# Altium PCB V1.PcbDoc
Units mm, origin at the board's own origin, x right, y up, seen from the top; angles counter-clockwise.
Board outline 39.1 x 25.27 mm, 4 copper layers (Component Side, Ground Plane, Power Plane, Solder Side), stack 0.844 mm thick; 49 components, 35 nets, 155 pads, 29 vias.
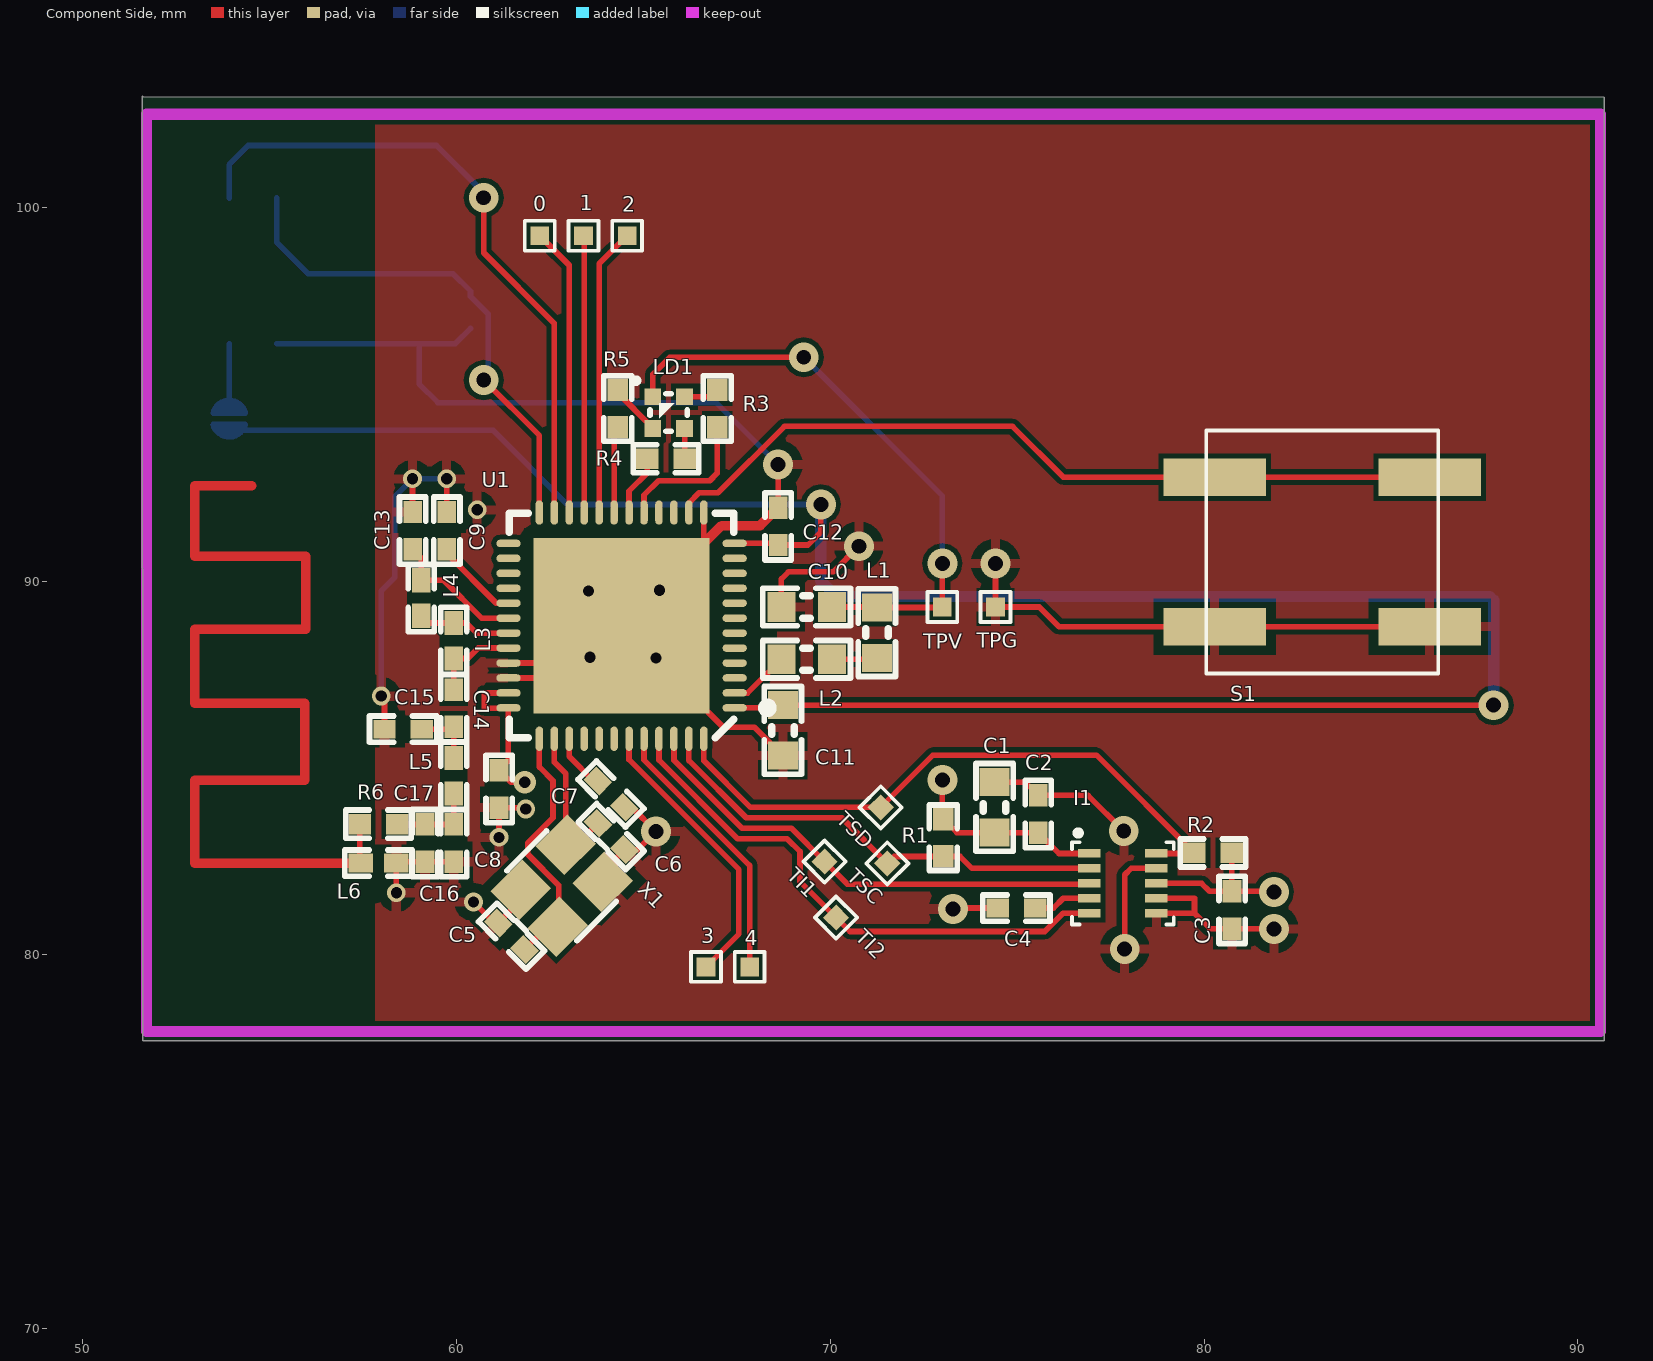
[diagram p0: Component Side view]
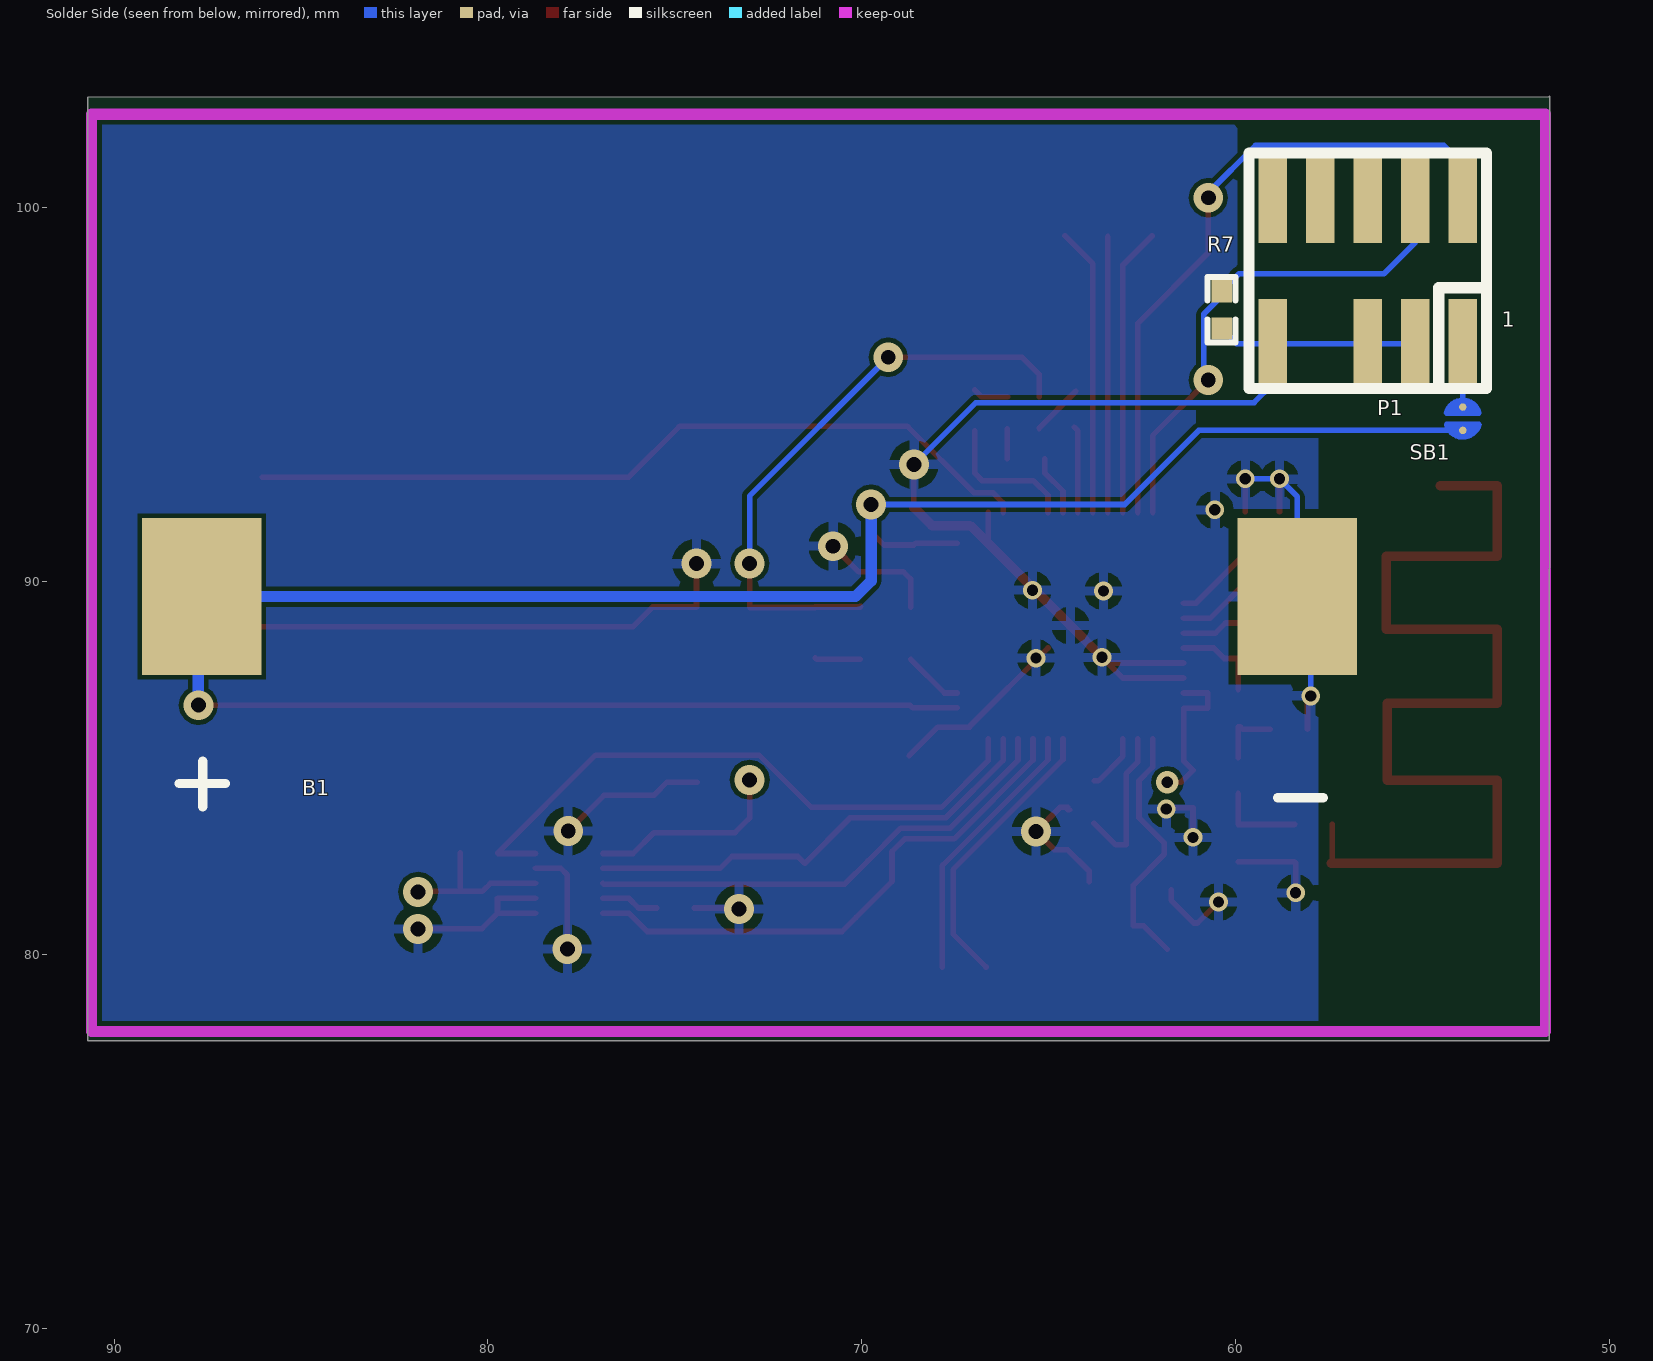
[diagram p1: Solder Side view, seen from below]
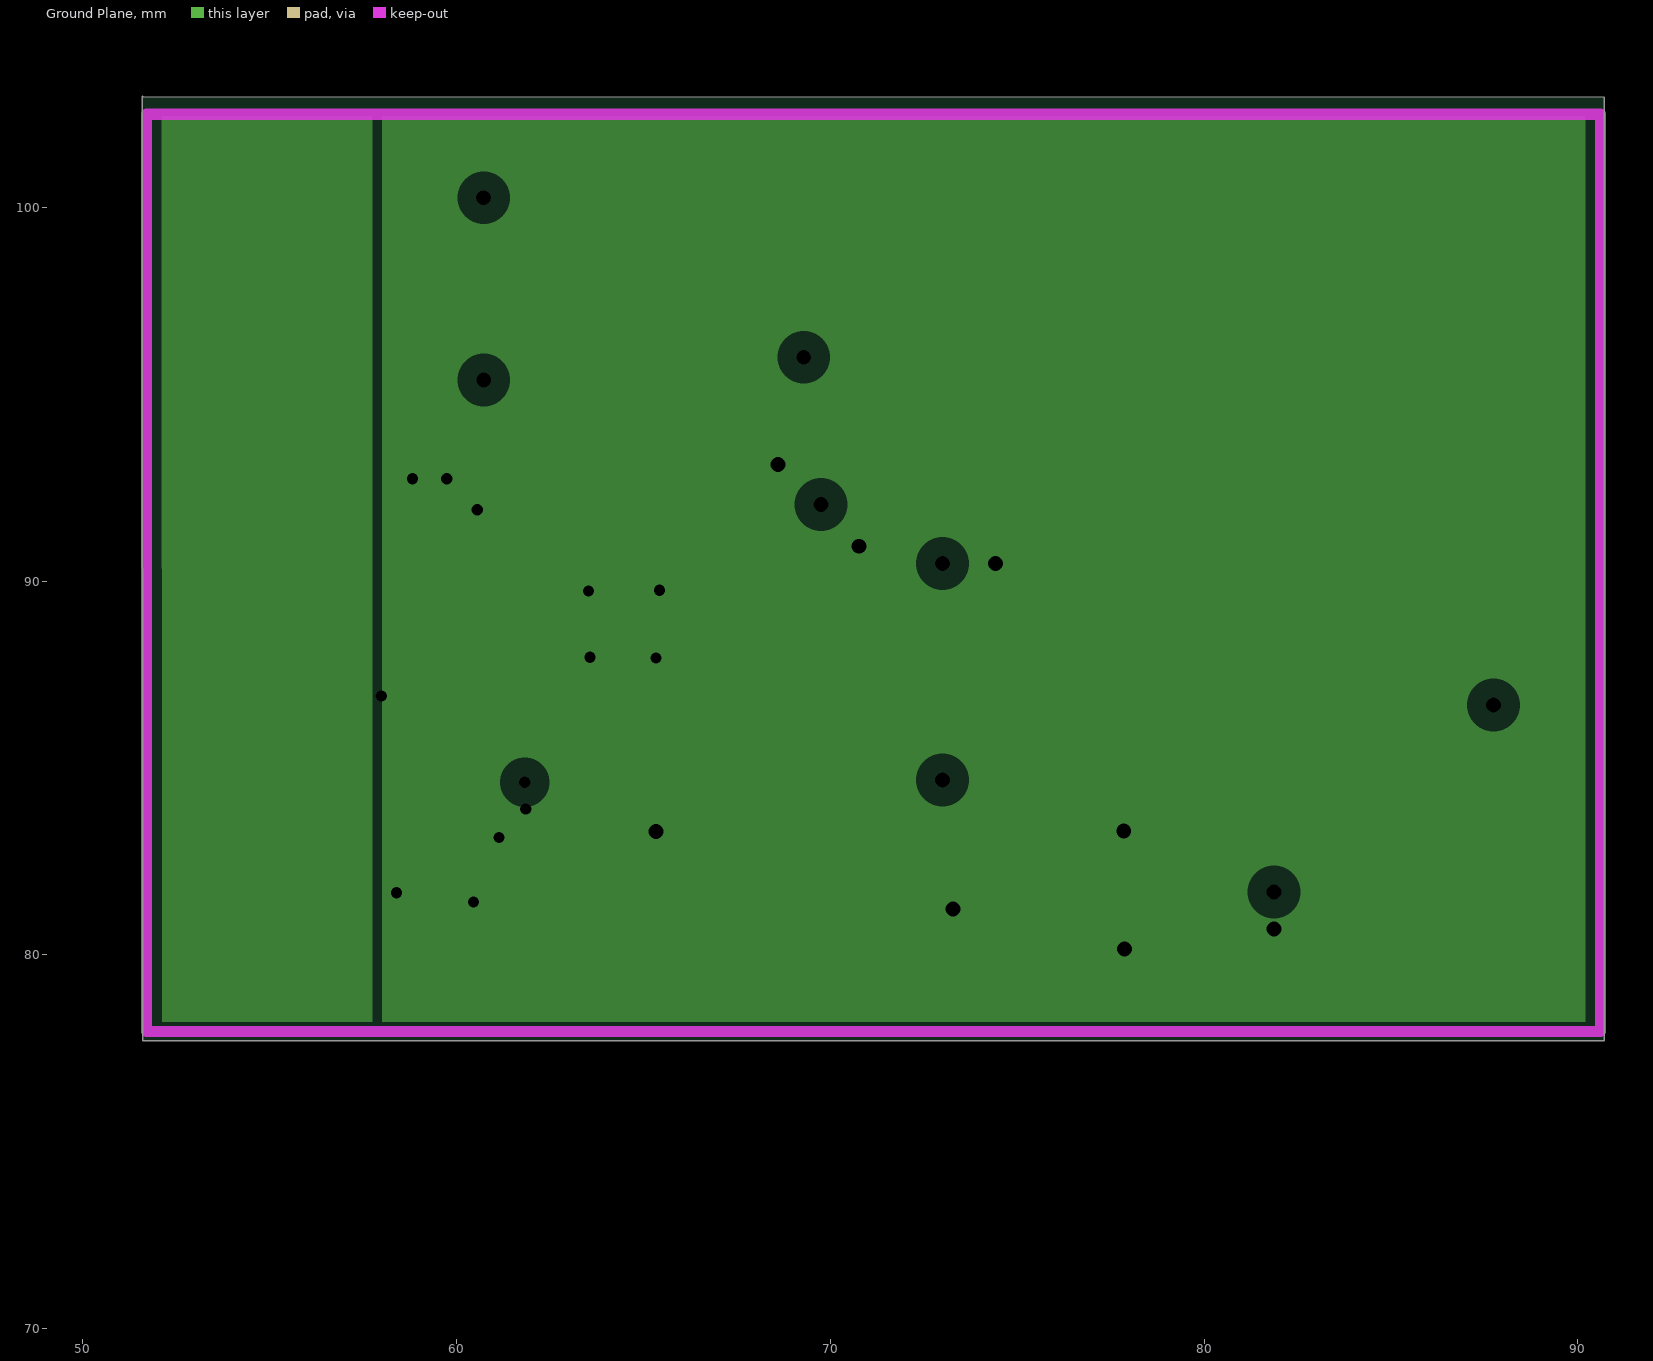
[diagram p2: Ground Plane, clearances drawn from the general rule]
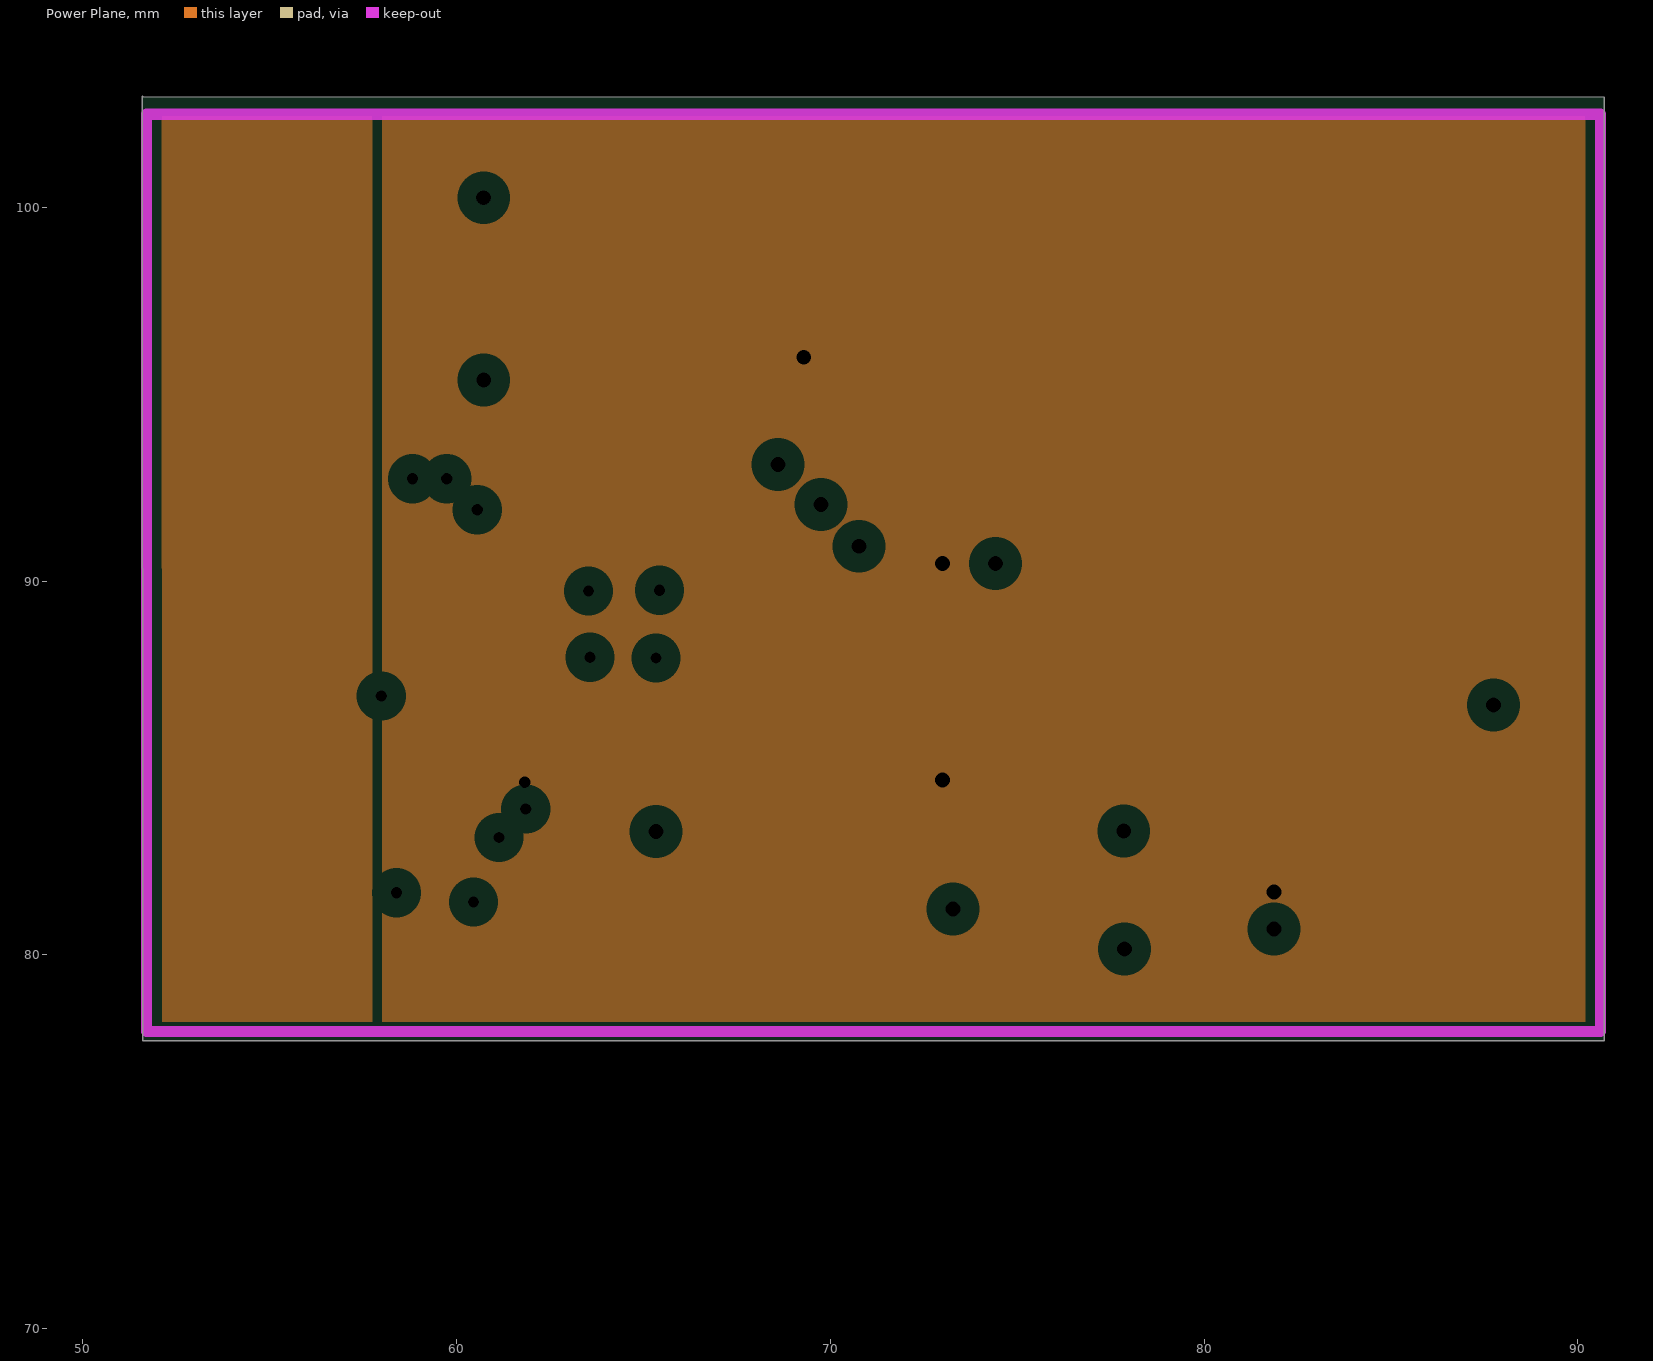
[diagram p3: Power Plane, clearances drawn from the general rule]
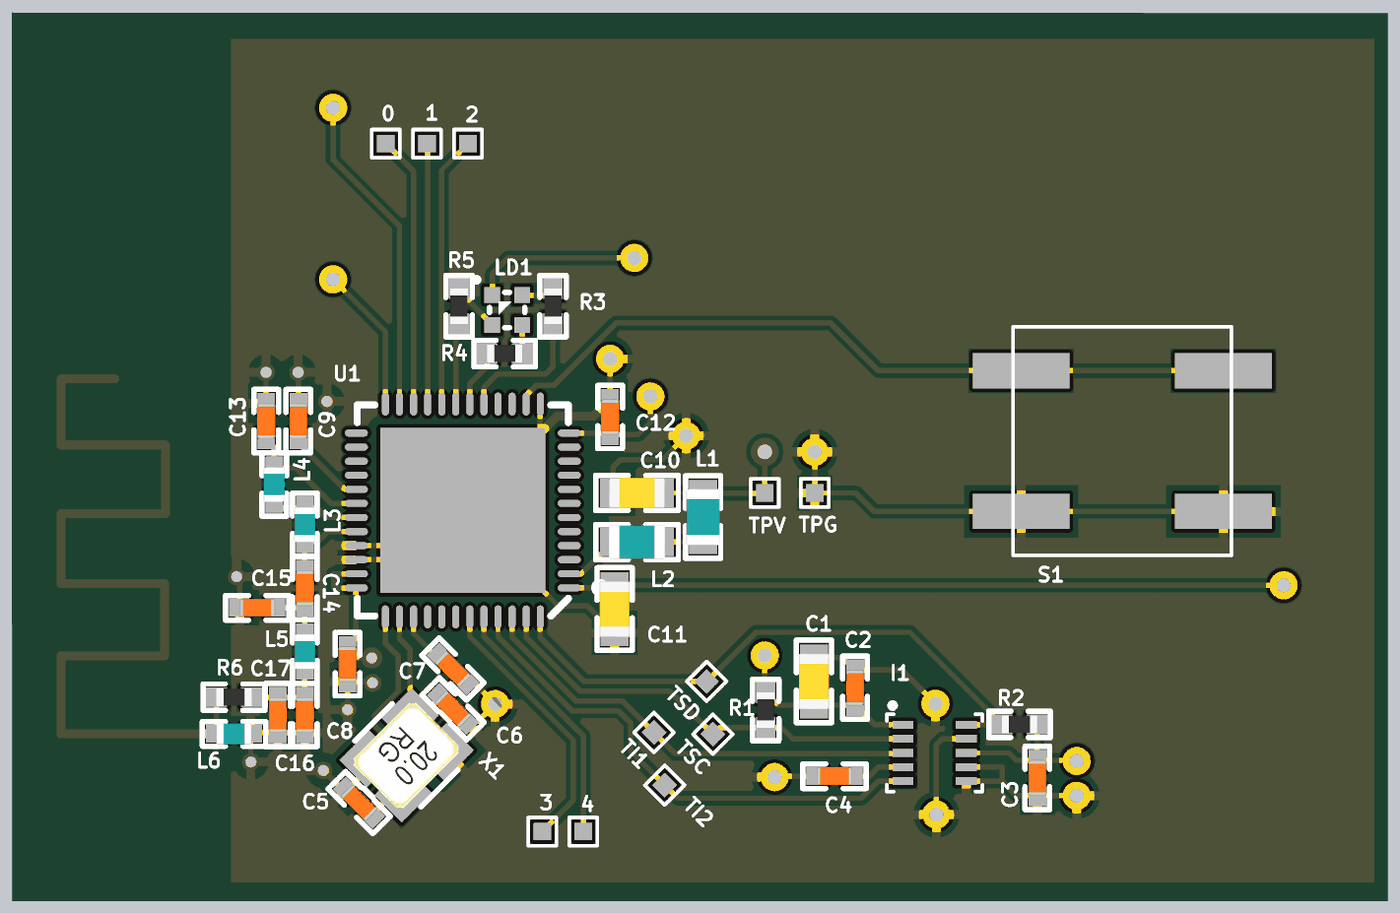
[diagram p4: 3D render of the assembled board from above, using the file's embedded part models]

## Layer stack, top to bottom
Top Solder: solder mask 0.0102, Solder Resist, Dk 3.5
Component Side: signal copper 0.0356
Dielectric 1: core 0.32, FR-4, Dk 4.8
Ground Plane: plane copper 0.036, net GND
Dielectric 3: prepreg 0.127, Dk 4.2
Power Plane: plane copper 0.036, net AVDD
Dielectric 4: core 0.254, Dk 4.2
Solder Side: signal copper 0.0356
Bottom Solder: solder mask 0.0102, Solder Resist, Dk 3.5

## Board outline
51.6,102.972 51.613,102.959 90.703,102.946 90.703,77.699 51.613,77.699

## Design rules (kind name [scope] priority, off if disabled: settings)
Clearance [All] p1: gap=0.127
HoleSize [All] p1: absolutevalues=TRUE maxlimit=2.54 minlimit=0.1 maxpercent=80.000 minpercent=20.000
MinimumAnnularRing [All] p1: minimumring=0.1
PlaneClearance [All] p1: clearance=0.508
PlaneConnect [All] p1: planeconnectstyle=Relief reliefexpansion=0.508 reliefentries=4 reliefconductorwidth=0.254 reliefairgap=0.254
PolygonConnect [All] p1: connectstyle=Relief reliefconductorwidth=0.254 reliefentries=4 polygonreliefangle="90 Angle" airgapwidth=0.254
RoomDefinition V1.3 [InComponentClass('V1.3')] p1: confinementstyle=ConfineIn formatcopy=TRUE lockcomponents=FALSE outline 52.316,78.156 90.729,78.156 90.729,101.854 52.316,101.854
RoutingVias [All] p1: holewidth=0.203 width=0.406 viastyle="Through Hole" minholewidth=0.1 minwidth=0.254 maxholewidth=0.711 maxwidth=1.27
SMDNeckDown [All] p1 off: percent=50.000
SolderMaskExpansion [All] p1: expansion=0.102
Width [All] p1: maxlimit=2.54 minlimit=0.025 preferedwidth=0.152
26 further rules are at their usual default settings.

## Classes and differential pairs
component class V1.3: 0 1 2 3 4 C1 C2 C3 C4 C5 C6 C7 C8 C9 C10 C11 C12 C13 C14 C15 C16 C17 I1 L1 L2 L3 L4 L5 L6 LD1 P1 R1 R2 R3 R4 R5 R6 R7 S1 TI1 TI2

## Components (designator, comment, footprint, x,y, rotation, side; value= is the part's Value field where it differs from the comment)
0 "Value" TP_SMD_0.5mmX0.5mm 62.23,99.238 r90 top
1 "Value" TP_SMD_0.5mmX0.5mm 63.398,99.238 r90 top
2 "Value" TP_SMD_0.5mmX0.5mm 64.567,99.238 r90 top
3 "Value" TP_SMD_0.5mmX0.5mm 66.675,79.68 r90 top
4 "Value" TP_SMD_0.5mmX0.5mm 67.843,79.68 r90 top
B1 "BAT" BU2032SM-BT-GTR 73,89.586 r180 top
C1 "1.0µF" CAPC1608X06L 74.397,83.947 r270 top
C2 "0.1µF" CAPC1005X04L 75.565,83.769 r270 top
C3 "0.1µF" CAPC1005X04L 80.747,81.204 r90 top
C4 "0.1µF" CAPC1005X04L 74.981,81.255 r0 top
C5 "12pF" CAPC1005X04L 61.473,80.502 r315 top
C6 "12pF" CAPC1005X04L 64.14,83.169 r135 top
C7 "0.1µF" CAPC1005X04L 64.135,84.303 r135 top
C8 "1000pF" CAPC1005X04L 61.142,84.439 r90 top
C9 "0.047µF" CAPC1005X04L 59.745,91.348 r270 top
C10 "1.0µF" CAPC1608X06L 69.367,89.306 r0 top
C11 "4.7µF" CAPC1608X06L 68.732,86.004 r90 top
C12 "0.1µF" CAPC1005X04L 68.605,91.465 r270 top
C13 "2200pF" CAPC1005X04L 58.831,91.348 r270 top
C14 "2.2pF" CAPC1005X04L 59.93,86.598 r270 top
C15 "0.80pF" CAPC1005X04L 58.577,86.039 r0 top
C16 "1.5pF" CAPC1005X04L 59.93,82.991 r90 top
C17 "1.0pF" CAPC1005X04L 59.161,82.991 r90 top
I1 "#NAME?" DFN10P200X200X100 77.826,81.915 r0 top
L1 "15nH" INDC1608X06L 71.247,88.621 r270 top
L2 "Value" INDC1608X06L 69.367,87.909 r180 top
L3 "4.7nH" INDC1005X04L 59.93,88.402 r270 top
L4 "Value" INDC1005X04L 59.061,89.545 r270 top
L5 "3.3nH" INDC1005X04L 59.93,84.795 r270 top
L6 "Value" INDC1005X04L 57.917,82.458 r180 top
LD1 "Value" SML-LX0404SIUPGUSB 65.678,94.507 r90 top
P1 "#NAME?" HDR_2x5-SMD-1.27mm-SWD 56.464,98.298 r0 top
R1 "Resistance" RESC1005X04L 73.025,83.134 r90 top
R2 "Resistance" RESC1005X04L 80.239,82.728 r0 top
R3 "Resistance" RESC1005X04L 66.98,94.615 r270 top
R4 "Resistance" RESC1005X04L 65.608,93.269 r180 top
R5 "Resistance" RESC1005X04L 64.313,94.615 r270 top
R6 "Resistance" RESC1005X04L 57.917,83.499 r180 top
R7 "Resistance" RESC1005X04L 60.376,97.257 r90 bottom
S1 "#NAME?" B3SL-1002P 83.16,90.78 r0 top
SB1 "Value" Solderbridge 53.924,94.031 r90 bottom
TI1 "Value" TP_SMD_0.5mmX0.5mm 69.85,82.499 r45 top
TI2 "Value" TP_SMD_0.5mmX0.5mm 70.155,81.001 r45 top
TPG "Value" TP_SMD_0.5mmX0.5mm 74.422,89.306 r90 top
TPV "Value" TP_SMD_0.5mmX0.5mm 73,89.306 r90 top
TSC "Value" TP_SMD_0.5mmX0.5mm 71.526,82.448 r45 top
TSD "Value" TP_SMD_0.5mmX0.5mm 71.349,83.947 r45 top
U1 "#NAME?" QFN40P600X600X90-48N 64.419,88.808 r180 top
X1 "16MHz" BT-XTAL_2520 62.819,81.848 r225 top

## Footprints (in the part's own frame and the unit in brackets; to place one, negate y for a bottom-side part, rotate by r counter-clockwise, add the part's x,y. Pads: shape width x height; smd on the part's side, far side on the other; paste and mask are expansions set on the pad)
B3SL-1002P [mm]
  rect 2.75x1 smd: 1(2.875,-2) 2(-2.875,-2) 3(2.875,2) 4(-2.875,2)
  silkscreen extent -3.1,-3.25 3.1,3.25, body extent -3.13,-3.25 3.13,3.25, height 3.4
BT-XTAL_2520 [mm]
  rect 1.2x1.1 smd: 1(-0.85,-0.7) 2(0.85,-0.7) 3(0.85,0.7) 4(-0.85,0.7)
  silkscreen extent -1.55,-1.33 1.53,1.32, body extent -1.25,-1 1.27,1, height 0.56
BU2032SM-BT-GTR [mm]
  rect 3.2x4.2 smd far side: 1(-14.65,0) 2(14.65,0)
  body extent -16,-8 16,8, height 5.3
CAPC1005X04L [mm]
  rect 0.6x0.5 smd: 1(-0.5,0) 2(0.5,0)
  silkscreen extent -0.9,-0.35 0.9,0.35, body extent -0.51,-0.25 0.51,0.25, height 0.5
CAPC1608X06L [mm]
  rect 0.75x0.8 smd: 1(-0.675,0) 2(0.675,0)
  silkscreen extent -1.17,-0.5 1.17,0.5, body extent -0.8,-0.43 0.8,0.43, height 0.8
DFN10P200X200X100 [mm]
  rect 0.6x0.225 smd: 1(-0.9,0.8) 2(-0.9,0.4) 3(-0.9,0) 4(-0.9,-0.4) 5(-0.9,-0.8) 6(0.9,-0.8) 7(0.9,-0.4) 8(0.9,0) 9(0.9,0.4) 10(0.9,0.8)
  silkscreen extent -1.36,-1.1 1.36,1.4, body extent -1,-1 1,1, height 1
HDR_2x5-SMD-1.27mm-SWD [mm]
  rect 0.76x2.4 smd far side: 1(-2.54,-1.95) 2(-2.54,1.95) 3(-1.27,-1.95) 4(-1.27,1.95) 5(0,-1.95) 6(0,1.95) 8(1.27,1.95) 9(2.54,-1.95) 10(2.54,1.95)
  body extent -3.16,-2.92 3.19,2.92, height 4.33
INDC1005X04L [mm]
  rect 0.65x0.5 smd: 1(-0.475,0) 2(0.475,0)
  silkscreen extent -0.9,-0.35 0.9,0.35, body extent -0.5,-0.3 0.5,0.3, height 0.5
INDC1608X06L [mm]
  rect 0.75x0.8 smd: 1(-0.675,0) 2(0.675,0)
  silkscreen extent -1.17,-0.5 1.17,0.5, body extent -0.8,-0.48 0.8,0.47, height 0.8
QFN40P600X600X90-48N [mm]
  oval 0.65x0.2 smd: 1(-3.025,2.2) 2(-3.025,1.8) 3(-3.025,1.4) 4(-3.025,1) 5(-3.025,0.6) 6(-3.025,0.2) 7(-3.025,-0.2) 8(-3.025,-0.6) 9(-3.025,-1) 10(-3.025,-1.4) 11(-3.025,-1.8) 12(-3.025,-2.2) 25(3.025,-2.2) 26(3.025,-1.8) 27(3.025,-1.4) 28(3.025,-1) 29(3.025,-0.6) 30(3.025,-0.2) 31(3.025,0.2) 32(3.025,0.6) 33(3.025,1) 34(3.025,1.4) 35(3.025,1.8) 36(3.025,2.2)
  oval 0.2x0.65 smd: 13(-2.2,-3.025) 14(-1.8,-3.025) 15(-1.4,-3.025) 16(-1,-3.025) 17(-0.6,-3.025) 18(-0.2,-3.025) 19(0.2,-3.025) 20(0.6,-3.025) 21(1,-3.025) 22(1.4,-3.025) 23(1.8,-3.025) 24(2.2,-3.025) 37(2.2,3.025) 38(1.8,3.025) 39(1.4,3.025) 40(1,3.025) 41(0.6,3.025) 42(0.2,3.025) 43(-0.2,3.025) 44(-0.6,3.025) 45(-1,3.025) 46(-1.4,3.025) 47(-1.8,3.025) 48(-2.2,3.025)
  rect 4.7x4.7 smd: 49(0,0)
  silkscreen extent -4.03,-3 3,3, body extent -3,-3 3,3, height 0.9
RESC1005X04L [mm]
  rect 0.6x0.55 smd: 1(-0.5,0) 2(0.5,0)
  silkscreen extent -0.87,-0.38 0.88,0.38, body extent -0.5,-0.25 0.5,0.25, height 0.3
SML-LX0404SIUPGUSB [mm]
  rect 0.45x0.45 smd paste+0: 1(0.425,0.425) 2(0.425,-0.425) 3(-0.425,-0.425) 4(-0.425,0.425)
  silkscreen extent -0.5,-0.5 0.92,0.93, body extent -0.5,-0.5 0.5,0.5, height 0.25
Solderbridge [mm]
  round 0.2 smd paste-10: 1(0,0) 2(0.625,0)
  Component Side region: 0.389,0.432 0.465,0.505 0.583,0.467 0.648,0.424 0.721,0.351 0.775,0.292 0.833,0.193 0.861,0.099 0.856,-0.122 0.831,-0.193 0.747,-0.33 0.663,-0.411 0.571,-0.469 0.47,-0.5 0.419,-0.483 0.389,-0.43
  Component Side region: 0.236,-0.432 0.16,-0.505 0.042,-0.467 -0.023,-0.424 -0.097,-0.351 -0.15,-0.292 -0.208,-0.193 -0.236,-0.099 -0.231,0.122 -0.206,0.193 -0.122,0.33 -0.038,0.411 0.054,0.469 0.155,0.5 0.206,0.483 0.236,0.43
  Component Side lines w0.152: 0.159,-0.431 cw(c0.27,0) 0,0.353 cw(c0.27,0) 0.159,0.431 ; 0.465,-0.431 ccw(c0.355,0) 0.799,0 ccw(c0.355,0) 0.465,0.431
TP_SMD_0.5mmX0.5mm [mm]
  rect 0.5x0.5 smd: 1(0,0)
  silkscreen extent -0.4,-0.4 0.4,0.4

## Part data
0 1 2 3 4 TI1 TI2 TPG TPV TSC TSD: "Regular Plated, 0.5mm hole"
B1: "HOLDER BATTERY COIN 20MM DIA SMD"
C1 C10: "CAP CER 1UF 16V 10% X7R 0603"
C2 C3 C4 C7: "CAP CER 0.1UF 16V 10% X7R 0402"
C5 C6: "CAP CER 10PF 50V 2% NP0 0402"
C8: "CAP CER 1000PF 50V 10% X7R 0402"
C9: library part CAP_0402_0.047µF, "CAP CER 0.047UF 16V 10% X7R 0402"
C11: "CAP CER 4.7UF 6.3V 10% X5R 0603"
C12: library part CAP_0402_0.1µF, "CAP CER 0.1UF 16V 10% X7R 0402"
C13: library part CAP_0402_2200pF, "CAP CER 2200PF 50V 10% X7R 0402"
C14: library part CAP_0402_2.2pF, "CAP CER 2.2PF 100V NP0 0402"
C15: library part CAP_0402_0.8pF, "CAP CER 0.8PF 50V NP0 0402"
C16: library part CAP_0402_1.5pF, "CAP CER 1.5PF 50V NP0 0402"
C17: library part CAP_0402_1.0pF, "CAP CER 1PF 50V NP0 0402"
I1: library part MMA8653FC, "IC ACCELEROMETER 3AXIS 10DFN"
L1: "INDUCTOR 15NH 10% 0603 SMD"
L2: "INDUCTOR MULTILAYER 10UH 0603"
L3: library part IND_0402_4.7nH, "INDUCTOR 4.7NH 0402 SMD"
L4: library part IND_0402_10nH, "INDUCTOR HI FREQ 10NH 5% 0402"
L5: library part IND_0402_3.3nH, "INDUCTOR 3.3NH 0402 SMD"
L6: library part IND_0402_1.8nH, "CER INDUCTOR 1.8NH 0402"
LD1: library part SML-LX0404SIUPGUSB, "RGB LED 1.00 mm x 1.00 mm SMD"
P1: library part CONN-2x5-SWD, "FTSH-105-01-L-DV  BOARD-BOARD CONN, HEADER, 10WAY, 2ROW"
R1 R2: library part RES_0402_1K, "RES 1.00K OHM 1/16W 1% 0402 SMD"
R3: "RES 560 OHM 1/16W 5% 0402 SMD"
R4: "RES 150 OHM 1/16W 5% 0402 SMD"
R5: "RES 82 OHM 1/16W 1% 0402 SMD"
R6: library part RES_0402_0, "RES 0.0 OHM 1/16W JUMP 0402 SMD"
R7: "RES 12.0K OHM 1/16W 1% 0402 SMD"
S1: library part B3SL-1002P, "SWITCH TACTILE SPST-NO 0.05A 12V"
SB1: "Solderbridge"
U1: "MULTIPROTOCOL BLUETOOTH 4.0 LOW ENERGY/2.4 GHZ RF SOC"
X1: "XTAL SMD 2520, 16MHz, 8pF, ±15ppm"

## Via types
v1: diameter 0.8, hole 0.4, Component Side to Solder Side, 15 vias
v2: diameter 0.5, hole 0.3, Component Side to Solder Side, tented both sides, 7 vias
v3: diameter 0.5, hole 0.3, Component Side to Solder Side, 4 vias
v4: diameter 0.8, hole 0.4, Component Side to Solder Side, tented top, 1 vias
v5: diameter 0.6, hole 0.3, Component Side to Solder Side, tented top, 1 vias
v6: diameter 0.5, hole 0.3, Component Side to Solder Side, tented top, 1 vias

## Nets (pads, with @x,y where several pads share a name; then routed paths per layer and width w, separated by ;. In a path a pad name is that pad's centre, name@x,y a point inside that pad or via, vN(x,y) a via of type N, cw(c..) or ccw(c..) an arc to the next point about the centre after c; other vN are vias at no path point)
ANT: L6.2 R6.2 | length 28.9
  Component Side w0.152: L6.2@57.417,82.483 R6.2
  Component Side w0.254: 54.522,92.55 52.996,92.55 52.996,90.67 55.965,90.67 55.965,88.715 52.996,88.715 52.996,86.733 55.94,86.733 55.94,84.676 52.996,84.676 52.996,82.458 L6.2
AVDD: C1.2 C2.2 C3.2 C8.2 C10.2 I1.1 I1.8 L1.1 LD1.1 R1.2 R2.2 TPV.1 U1.35 U1.36 | length 30
  Component Side w0.152: U1.35 60.745,87.008 60.745,86.601 61.386,86.601 61.386,85.184 C8.2 61.464,84.617 v5(61.828,84.617) ; LD1.1 65.253,95.529 65.71,95.987 v1(69.291,95.987) ; C10.2@70.028,89.321 70.042,89.321 70.057,89.306 71.247,89.306 71.258,89.296 72.989,89.296 TPV.1 v4(73,90.475) ; v1(73,84.684) 73,83.66 R1.2 73.387,83.272 C1.2 C2.2@75.562,83.272 ; C2.2 76.119,82.715 I1.1 ; I1.8 79.934,81.915 80.145,81.704 C3.2@80.733,81.704 ; C3.2@80.739,81.712 R2.2 ; C3.2 v1@81.847,81.704
  Solder Side w0.152: v1(69.291,95.987) 73,92.278 73,90.729 72.873,90.602 v4(73,90.475)
  other v1: 81.864,81.686
BTN0: S1.3 S1.4 U1.14 | length 21.9
  Component Side w0.152: U1.14 66.219,92.087 66.493,92.361 ; 66.936,92.361 66.493,92.361 ; S1.3 S1.4 76.232,92.78 74.873,94.139 68.775,94.139 66.998,92.361 66.493,92.361
GND: B1.2 C1.1 C2.1 C3.1 C4.1 C5.1 C6.1 C7.1 C8.1 C9.1 C10.1 C11.1 C12.1 C13.1 C15.1 C16.1 C17.1 I1.6 I1.7 I1.9 L6.1 P1.3 P1.5 P1.9 R7.1 S1.1 S1.2 TPG.1 U1.13 U1.33 U1.34 U1.49 X1.2 X1.4 | length 82.7
  Component Side w0.152: v6(57.993,86.929) 58.077,86.844 C15.1 ; v2(58.395,81.661) 58.392,81.664 L6.1 58.425,82.491 C17.1 C16.1 ; C13.1@58.826,91.853 v2(58.826,92.735) ; C9.1@59.741,91.852 v2(59.741,92.735) ; v2(60.456,81.417) 61.017,80.856 C5.1 61.723,81.459 X1.2 ; v2(61.142,83.144) C8.1 v2@61.82,83.939 ; U1.34 63.019,87.408 U1.49@63.419,87.808 ; U1.33 U1.49@63.419,87.808 ; v3(63.573,87.962) U1.49@63.419,87.808 ; X1.4 63.915,82.237 C6.1 64.849,82.816 v1(65.337,83.304) 64.692,83.949 C7.1 ; C7.1@64.442,83.883 C7.1@64.489,83.883 ; U1.49@65.019,88.208 67.111,86.116 67.111,86.09 67.971,86.09 C11.1 ; U1.49@66.619,91.13 U1.13 ; C12.1 v1(68.605,93.116) ; C10.1 68.692,90.054 68.885,90.246 70.079,90.246 v1(70.764,90.932) ; v1@73.304,81.255 C4.1 ; C1.1 75.212,84.622 C2.1 76.894,84.269 v1(77.851,83.312) ; v1(74.42,90.475) 74.422,90.473 TPG.1 75.59,89.306 76.117,88.78 S1.2 S1.1 ; v1(77.876,80.162) 77.876,82.144 78.048,82.315 I1.9 ; I1.6 79.743,81.115 ; I1.7 79.743,81.515 79.743,81.115 ; C3.1@80.733,80.704 80.155,80.704 79.743,81.115 ; C3.1 v1@81.856,80.704
  Component Side w0.254: v3(63.573,87.962) U1.49 67.096,91.485 68.125,91.485 C12.1
  Solder Side w0.152: P1.3 P1.5 P1.9 ; v6(57.993,86.929) 57.993,89.737 58.35,90.094 58.35,92.259 v2(58.826,92.735) v2(59.741,92.735) ; R7.1 59.967,96.348 P1.9 ; v1(68.605,93.116) 66.948,94.774 59.506,94.774 59.004,95.275 P1.9
  other v1: 81.864,80.696 73.279,81.229
  other v2: 61.853,83.906 60.558,91.907
  other v3: 65.34,87.94 63.535,89.735 65.435,89.755
IMUINT1: I1.3 TI1.1 U1.46 | length 13.1
  Component Side w0.152: U1.46 65.819,85.208 67.638,83.388 68.961,83.388 TI1.1 70.457,81.892 76.902,81.892 I1.3
IMUINT2: I1.5 TI2.1 U1.45 | length 14.6
  Component Side w0.152: U1.45 65.419,85.213 67.523,83.109 68.845,83.109 69.19,82.765 69.19,81.966 TI2.1 70.529,80.626 75.738,80.626 76.226,81.115 I1.5
IMUSCL: I1.2 R1.1 TSC.1 U1.47 | length 12.6
  Component Side w0.152: U1.47 66.219,85.202 67.754,83.668 70.307,83.668 TSC.1 71.712,82.634 R1.1 73.474,82.634 73.793,82.315 I1.2
IMUSDA: I1.10 R2.1 TSD.1 U1.48 | length 16.9
  Component Side w0.152: U1.48 66.619,85.197 67.869,83.947 TSD.1 72.746,85.344 77.122,85.344 R2.1 ; I1.10 R2.1@79.726,82.715
LEDB: R4.2 U1.18 | length 1.6
  Component Side w0.152: U1.18 64.619,92.406 65.108,92.896 R4.2
LEDG: R5.2 U1.19 | length 2.3
  Component Side w0.152: U1.19 64.219,94.021 R5.2
LEDR: R3.2 U1.17 | length 3.8
  Component Side w0.152: U1.17 65.019,92.298 65.405,92.685 66.777,92.685 66.98,92.888 R3.2@66.98,94.013
Net0_1: 0.1 U1.22 | length 7.7
  Component Side w0.152: 0.1 63.019,98.449 U1.22
Net1_1: 1.1 U1.21 | length 7.4
  Component Side w0.152: U1.21 1.1@63.419,99.217
Net2_1: 2.1 U1.20 | length 7.7
  Component Side w0.152: U1.20 63.819,98.49 2.1
Net3_1: 3.1 U1.43 | length 7.7
  Component Side w0.152: U1.43 64.619,85.224 67.555,82.287 67.555,80.56 3.1
Net4_1: 4.1 U1.44 | length 7.3
  Component Side w0.152: U1.44 65.019,85.219 67.843,82.394 4.1
NetC4_2: C4.2 I1.4 | length 1.6
  Component Side w0.152: C4.2 75.971,81.255 76.232,81.515 I1.4
NetC5_2: C5.2 U1.37 X1.3 | length 7
  Component Side w0.152: C5.2 62.456,80.779 62.739,80.779 62.739,81.862 61.909,82.692 61.909,82.993 62.586,83.67 62.586,84.658 62.219,85.025 U1.37
NetC6_2: C6.2 U1.38 X1.1 | length 4.1
  Component Side w0.152: U1.38 62.619,85.158 62.925,84.852 X1.1 63.208,82.944 C6.2
NetC7_2: C7.2 U1.39 | length 1.5
  Component Side w0.152: U1.39 63.019,85.306 63.669,84.656 C7.2
NetC9_2: C9.2 U1.29 | length 2.3
  Component Side w0.152: C9.2@59.745,90.732 61.068,89.408 U1.29
  Component Side w0.254: C9.2@59.745,90.732 C9.2
NetC13_2: C13.2 L4.1 U1.30 | length 3.3
  Component Side w0.152: C13.2@59.061,90.618 L4.1 59.663,90.02 60.675,89.008 U1.30
NetC14_1: C14.1 L3.2 U1.32 | length 2.4
  Component Side w0.152: C14.1 L3.2 60.304,87.927 60.585,88.208 U1.32
NetC14_2: C14.2 C15.2 L5.1 | length 1.6
  Component Side w0.152: C15.2 59.813,86.039 C14.2@59.872,86.098 ; L5.1 C14.2
NetC16_2: C16.2 C17.2 L5.2 R6.1 | length 2.3
  Component Side w0.152: R6.1 58.425,83.491 C17.2 C16.2 L5.2
NetL1_2: L1.2 L2.1 | length 1.2
  Component Side w0.152: L2.1 71.211,87.909 L1.2
NetL2_2: L2.2 U1.2 | length 1.6
  Component Side w0.152: U1.2 67.791,87.008 L2.2
NetL3_1: L3.1 L4.2 U1.31 | length 2.3
  Component Side w0.152: L4.2@59.254,88.877 L3.1 60.271,88.877 60.54,88.608 U1.31
NetLD1_2: LD1.2 R3.1 | length 1
  Component Side w0.152: LD1.2 66.796,94.932 R3.1
NetLD1_3: LD1.3 R4.1 | length 0.8
  Component Side w0.152: R4.1 LD1.3@66.108,94.076
NetLD1_4: LD1.4 R5.1 | length 1.4
  Component Side w0.152: R5.1@64.275,95.077 65.253,94.099 LD1.4
NetP1_1: P1.1 SB1.2 | length 1.7
  Solder Side w0.152: SB1.2 53.924,94.83 P1.1
SWDCLK: P1.4 R7.2 U1.24 | length 13.7
  Component Side w0.152: v1(60.732,95.377) 62.219,93.89 U1.24
  Solder Side w0.152: P1.4 55.194,99.06 56.032,98.222 59.911,98.222 R7.2 60.376,97.619 60.854,97.141 60.854,95.499 v1(60.732,95.377)
SWDIO: P1.2 U1.23 | length 17.8
  Component Side w0.152: v1(60.731,100.254) 60.731,98.781 62.619,96.893 U1.23
  Solder Side w0.152: P1.2 53.924,101.143 54.432,101.651 59.468,101.651 60.731,100.388 v1(60.731,100.254)
VBAT+: B1.1 C11.2 C12.2 SB1.1 U1.1 U1.12 | length 63.2
  Component Side w0.152: U1.1 68.636,86.608 68.707,86.679 C11.2 v1(87.745,86.68) ; U1.12 68.562,91.008 C12.2 69.401,90.965 69.748,91.313 v1(69.748,92.05)
  Solder Side w0.152: SB1.1 54.277,94.031 60.985,94.031 62.967,92.05 v1(69.748,92.05) ; B1.1 B1.1@87.745,89.49
  Solder Side w0.3: v1(69.748,92.05) 69.748,90.005 70.168,89.586 B1.1 ; v1(87.745,86.68) B1.1@87.745,89.49
pads on no net: P1.6 P1.8 P1.10 U1.3 U1.4 U1.5 U1.6 U1.7 U1.8 U1.9 U1.10 U1.11 U1.15 U1.16 U1.25 U1.26 U1.27 U1.28 U1.40 U1.41 U1.42

## Polygon pours and split planes (outlines as drawn)
GND on Component Side "Top Layer-No Net" (solid, pour order 6): 57.836,102.79 90.635,102.79 90.635,77.673 57.836,77.673
GND on Solder Side "Top Layer-No Net" (solid, pour order 8): 57.795,102.174 57.87,102.245 90.703,102.245 90.703,77.724 57.795,77.724
GND on Ground Plane (split plane): 90.193,102.436 90.193,78.209 58.016,78.209 58.016,102.446
GND on Ground Plane (split plane): 57.757,102.446 57.757,78.209 52.123,78.209 52.111,102.448
AVDD on Power Plane (split plane): 90.193,102.436 90.193,78.209 58.016,78.209 58.016,102.446
AVDD on Power Plane (split plane): 57.757,102.446 57.757,78.209 52.123,78.209 52.111,102.448

## Keep-outs
Keep-Out Layer:
  lines w0.3: 51.714,77.953 88.189,77.953 90.602,77.953 90.602,93.942 90.602,102.489 88.189,102.489 51.714,102.489 51.714,77.953

## Other copper
Component Side:
  pour cut-out: 68.199,88.652 68.565,88.652 68.565,88.435 68.564,88.436 68.287,88.436 68.287,88.437 68.197,88.527
  pour cut-out: 68.228,90.801 67.786,90.801 67.765,87.51 67.765,87.525 67.995,87.505 68.19,87.7 68.19,87.72 68.21,89.965 68.485,89.96 68.499,90.12 68.775,90.417 68.738,90.538 68.228,90.538
  pour cut-out: 70.693,83.74 71.022,83.74 71.349,83.414 71.882,83.947 71.768,84.061 71.768,84.073 72.353,84.659 72.475,84.622 72.503,84.478 72.62,84.304 72.793,84.189 72.793,84.061 72.623,84.061 72.623,82.841 71.682,82.841 71.674,82.834 71.526,82.982 71.406,82.861 70.645,83.623
  pour cut-out: 66.878,91.262 61.976,91.262 61.976,86.36 66.878,86.36
Solder Side:
  pour cut-out: 59.99,98.413 59.954,98.466 59.954,98.42
  pour cut-out: 59.95,102.435 57.705,102.415 57.71,98.545 57.71,94.18 61.065,94.222 61.065,94.575 59.955,97.31 59.955,97.785
Ground Plane (plane layer: these items are gaps in the copper):
  lines w0.254: 50.14,70.866 50.14,103.784 ; 50.14,70.866 57.887,70.866 ; 50.14,70.866 57.887,70.866 ; 50.14,103.784 57.887,103.784 ; 50.14,103.784 57.887,103.784 ; 57.887,70.866 57.887,103.784
Power Plane (plane layer: these items are gaps in the copper):
  lines w0.254: 50.14,70.866 50.14,103.784 57.887,103.784 57.887,70.866 50.14,70.866

## Silkscreen, mask and mechanical layers (free items; w line width, h text height)
Drill Drawing:
  text ".LEGEND" at 54.915,71.501 h0.4
  text "Drill Drawing." at 57.252,69.774 h0.4

## Dimensions
51.613,77.699 to 90.703,77.699 on Mechanical 1
51.613,77.699 to 51.6,102.972 on Mechanical 1

## Panel: embedded boards
"" at 87.495,101.115, 4 rows x 2 columns, spacing 63.5 x 38.1, rotation 0
"" at 87.555,100.88, 4 rows x 2 columns, spacing 63.5 x 38.1, rotation 0
"" at 51.215,103.445, 4 rows x 2 columns, spacing 63.5 x 38.1, rotation 0

## Text inside footprints (layer, text, board x,y; h text height)
P1: Bottom Overlay "1" at 52.883,96.799 h0.4